# EAGLE board RFID_Controller (EAGLE 7.2.0)
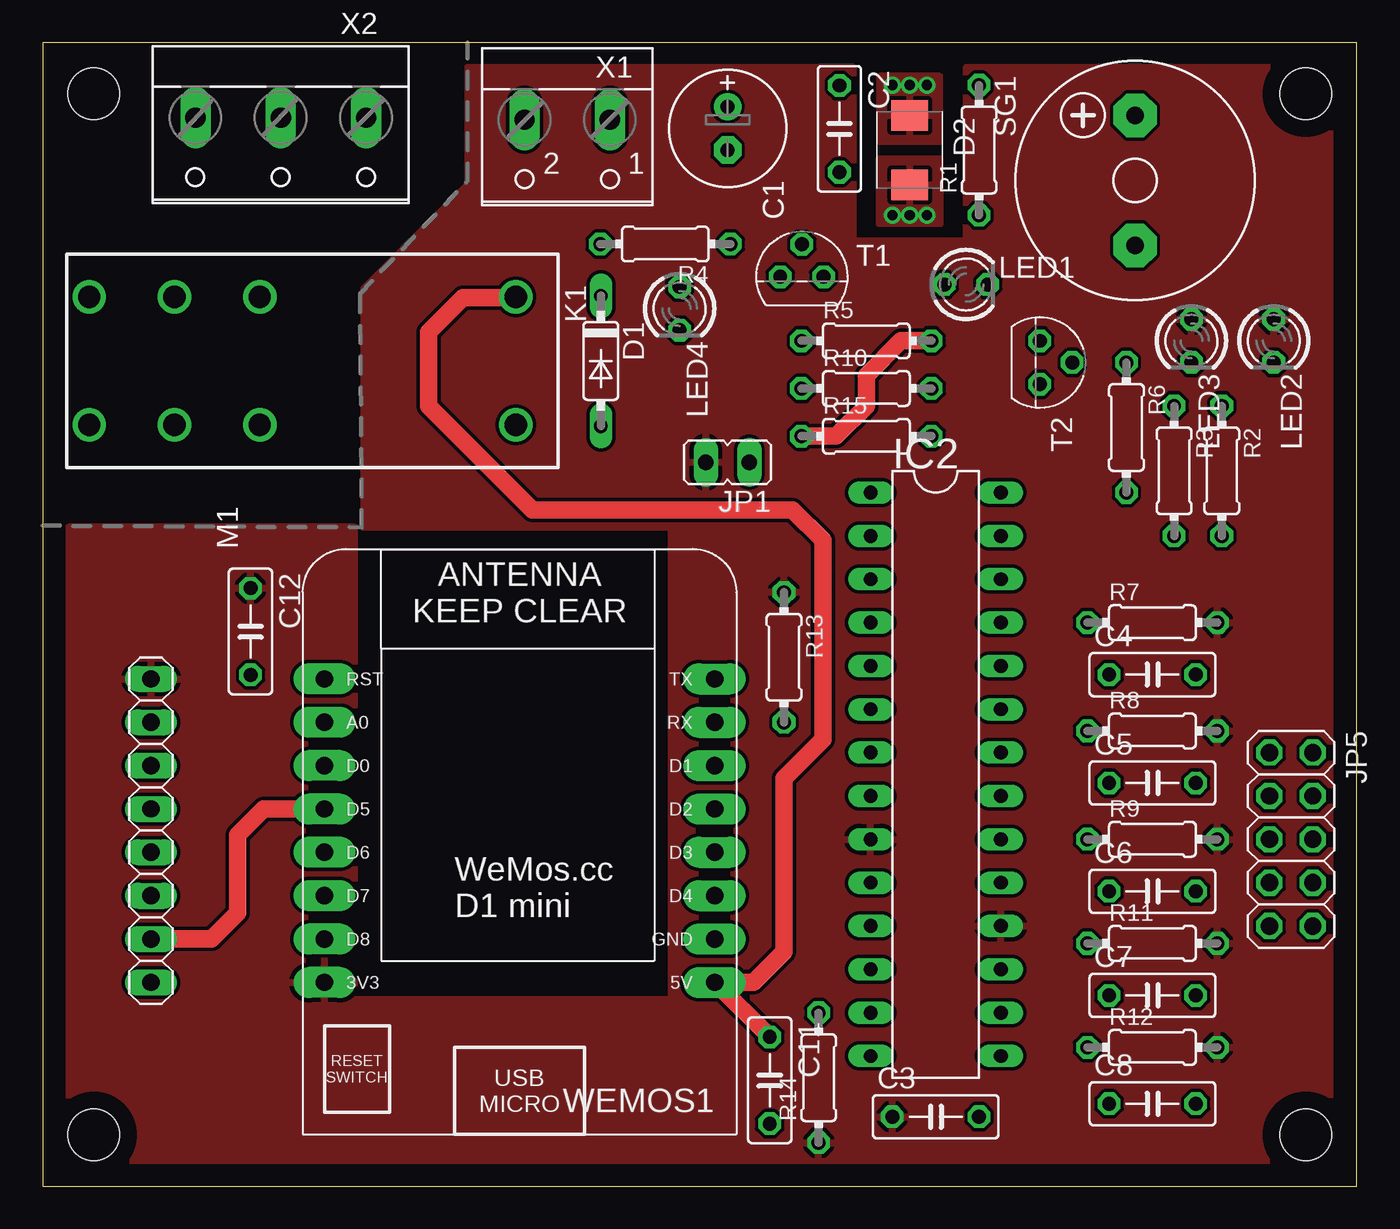
[diagram p0: board, top side]
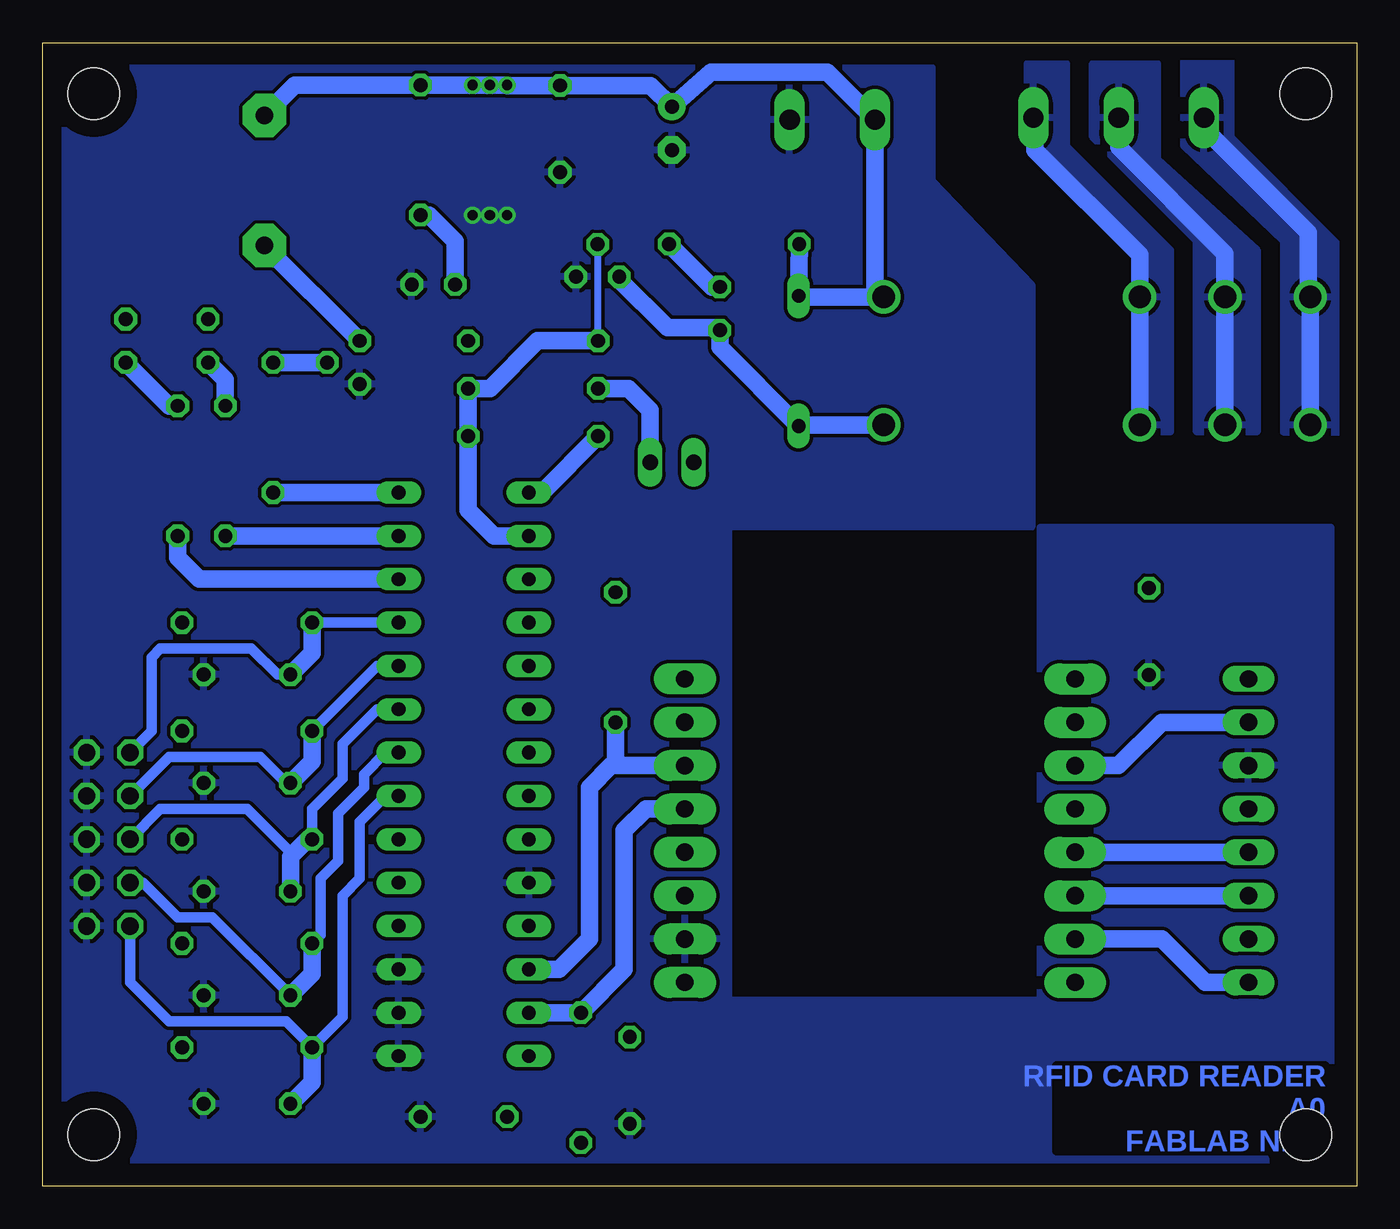
[diagram p1: board, bottom side, seen from below]

Size 77 x 67 mm. Coordinates in mm from the lower left corner, seen from the top.
Outline: 0,0 77,0 77,67 0,67 0,0
Copper layers (1*16): Top 0.035mm / dielectric 1.5mm / Bottom 0.035mm
Design rules "default *": minimum track width 10mil, minimum drill 0.2mm, track to track 8mil, track to pad 8mil, pad to pad 8mil, via to via 8mil, smd to smd 8mil, copper to edge 40mil, drill to drill 8mil, minimum pad ring 10mil, minimum via ring 8mil, stop-mask expansion 4mil, vias tented up to drill 0mil, thermal gap 10mil
Net classes: 1 HV: clearance 5 mm to class 0, clearance 1 mm
Holes 3 mm at 3,64 74,64 74,3 3,3

## Footprints (pad centres in the part's own frame; a part is rotated, then mirrored left to right if it is on the bottom)
E2,5-7 = drill 0.813 pad 1.6: + -1.27,0 | drill 0.813 pad 1.6 octagon: - 1.27,0
C050-025X075 = drill 0.813 octagon: 1 -2.54,0; 2 2.54,0
DO35-7 = drill 0.813 long: A 3.81,0; C -3.81,0
SMBJ = smd 1.78 x 2.16: A 2.04,0; C -2.03,0
DIL28-3 = drill 0.813 long: 1 -16.51,-3.81; 2 -13.97,-3.81; 3 -11.43,-3.81; 4 -8.89,-3.81; 5 -6.35,-3.81; 6 -3.81,-3.81; 7 -1.27,-3.81; 8 1.27,-3.81; 9 3.81,-3.81; 10 6.35,-3.81; 11 8.89,-3.81; 12 11.43,-3.81; 13 13.97,-3.81; 14 16.51,-3.81; 15 16.51,3.81; 16 13.97,3.81; 17 11.43,3.81; 18 8.89,3.81; 19 6.35,3.81; 20 3.81,3.81; 21 1.27,3.81; 22 -1.27,3.81; 23 -3.81,3.81; 24 -6.35,3.81; 25 -8.89,3.81; 26 -11.43,3.81; 27 -13.97,3.81; 28 -16.51,3.81
JP1 = drill 0.914 long: 1 0,-1.27; 2 0,1.27
2X05 = drill 1.016 octagon: 1 -5.08,-1.27; 2 -5.08,1.27; 3 -2.54,-1.27; 4 -2.54,1.27; 5 0,-1.27; 6 0,1.27; 7 2.54,-1.27; 8 2.54,1.27; 9 5.08,-1.27; 10 5.08,1.27
FTR-K1C = drill 1.3 pad 1.93: 1 -12.5,-3.75; 2 2.5,-3.75; 3 7.5,-3.75; 4 12.5,-3.75; 5 12.5,3.75; 6 7.5,3.75; 7 2.5,3.75; 8 -12.5,3.75
LED3MM = drill 0.813 octagon: A -1.27,0; K 1.27,0
RFID-RC522 = drill 1.016 long: 3V3 -8.89,0; GND -3.81,0; IRQ -1.27,0; MISO 1.27,0; MOSI 3.81,0; RST -6.35,0; SCK 6.35,0; SS 8.89,0
0204/7 = drill 0.813 octagon: 1 -3.81,0; 2 3.81,0
F/CM12P = drill 1.016 pad 2.54 octagon: + 3.81,0; - -3.81,0
TO92 = drill 0.813 octagon: 1 1.27,0; 2 0,1.905; 3 -1.27,0
WEMOS-D1-MINI = drill 1.016 pad 1.829 long: 3V3 -10.16,-10.16; 5V 12.7,-10.16; A0 -10.16,5.08; D0 -10.16,2.54; D1 12.7,2.54; D2 12.7,0; D3 12.7,-2.54; D4 12.7,-5.08; D5 -10.16,0; D6 -10.16,-2.54; D7 -10.16,-5.08; D8 -10.16,-7.62; GND 12.7,-7.62; RESET -10.16,7.62; RX 12.7,5.08; TX 12.7,7.62
W237-102 = drill 1.194 long: 1 -2.5,-1.27; 2 2.5,-1.27
W237-103 = drill 1.194 long: 1 -5,-1.29; 2 0,-1.29; 3 5,-1.29

## Placement (x,y rotation side)
C1  100u  [E2,5-7]  40.13,61.98 270 top
C2  100n  [C050-025X075]  46.69,61.95 270 top
C3  100n  [C050-025X075]  52.32,4.06 0 top
C4  100n  [C050-025X075]  65.02,29.97 0 top
C5  100n  [C050-025X075]  65.02,23.62 0 top
C6  100n  [C050-025X075]  65.02,17.27 0 top
C7  100n  [C050-025X075]  65.02,11.18 0 top
C8  100n  [C050-025X075]  65.02,4.83 0 top
C11  100n  [C050-025X075]  42.6,6.2 270 top
C12  100n  [C050-025X075]  12.18,32.5 270 top
D1  1N4148DO35-7  [DO35-7]  32.7,48.35 270 top
D2  SM6T5A  [SMBJ]  50.8,60.71 270 top
IC2  MCP23017SP  [DIL28-3]  52.32,24.13 270 top
JP1  [JP1]  40.13,42.42 90 top
JP5  [2X05]  73.15,20.32 270 top
K1  FTR-K1C  [FTR-K1C]  15.22,48.35 180 top
LED1  [LED3MM]  54.1,52.83 0 top
LED2  [LED3MM]  72.14,49.53 270 top
LED3  [LED3MM]  67.31,49.53 270 top
LED4  [LED3MM]  37.32,51.42 270 top
M1  [RFID-RC522]  6.35,20.83 270 top
R1  220  [0204/7]  54.86,60.71 90 top
R2  100R  [0204/7]  69.09,41.91 270 top
R3  100R  [0204/7]  66.29,41.91 270 top
R4  220  [0204/7]  36.48,55.2 180 top
R5  1k  [0204/7]  48.26,49.53 0 top
R6  1k  [0204/7]  63.5,44.45 270 top
R7  10k  [0204/7]  65.02,33.02 0 top
R8  10k  [0204/7]  65.02,26.67 0 top
R9  10k  [0204/7]  65.02,20.32 0 top
R10  1k  [0204/7]  48.26,46.74 0 top
R11  10k  [0204/7]  65.02,14.22 0 top
R12  10k  [0204/7]  65.02,8.13 0 top
R13  1k  [0204/7]  43.43,30.99 270 top
R14  1k  [0204/7]  45.47,6.35 90 top
R15  1k  [0204/7]  48.26,43.94 0 top
SG1  F/CM12P  [F/CM12P]  64.01,58.93 90 top
T1  BC547  [TO92]  44.49,53.28 0 top
T2  BC547  [TO92]  58.42,48.26 270 top
WEMOS1  [WEMOS-D1-MINI]  26.67,22.1 0 top
X1  [W237-102]  30.73,61.21 180 top
X2  [W237-103]  13.95,61.31 180 top

## Library data of the parts
C1-C8 C11 C12 R1-R15 = rcl
D1 D2 = diode
IC2 = microchip; MF: MICROCHIP; MPN: MCP23017-E/SP; OC_FARNELL: 1332088; OC_NEWARK: 31K2959
JP1 = jumper
JP5 = pinhead
K1 = relay; OC_FARNELL: unknown; OC_NEWARK: unknown
LED1-LED4 = led
M1 = mfrc522-module
SG1 = buzzer; OC_FARNELL: unknown; OC_NEWARK: unknown
T1 T2 = transistor
WEMOS1 = esp8266modules
X1 = con-wago-500; MPN: 237-102; OC_FARNELL: unknown; OC_NEWARK: 70K9898
X2 = con-wago-500; MPN: 237-103; OC_FARNELL: unknown; OC_NEWARK: 18M7116

## Nets
3V3: C3.1 C12.1 IC2.9 IC2.18 JP1.2 LED2.A LED3.A M1.3V3 R7.2 R8.2 R9.2 R11.2 R12.2 R13.1 R14.1 WEMOS1.3V3
5V: C1.+ C2.1 C11.1 D1.C D2.C K1.1 R1.2 R4.2 SG1.+ WEMOS1.5V X1.2
BUZZ: IC2.28 R6.2
CLK: M1.SCK WEMOS1.D5
CONN: IC2.27 R3.2
CS: M1.SS WEMOS1.D8
DK: C4.1 IC2.25 JP5.1 R7.1
EX0: C5.1 IC2.24 JP5.3 R8.1
EX1: C6.1 IC2.23 JP5.5 R9.1
EX2: C7.1 IC2.22 JP5.7 R11.1
EX3: C8.1 IC2.21 JP5.9 R12.1
GND: C1.- C2.2 C3.2 C4.2 C5.2 C6.2 C7.2 C8.2 C11.2 C12.2 D2.A IC2.10 IC2.15 IC2.16 IC2.17 JP5.2 JP5.4 JP5.6 JP5.8 JP5.10 LED1.K M1.GND T1.1 T2.1 WEMOS1.GND X1.1
MISO: M1.MISO WEMOS1.D6
MOSI: M1.MOSI WEMOS1.D7
N$1: LED1.A R1.1
N$2: LED2.K R2.1
N$3: LED3.K R3.1
N$4: LED4.A R4.1
N$5: D1.A K1.8 LED4.K T1.3
N$6: R6.1 T2.2
N$7: SG1.- T2.3
N$8: IC2.1 R5.2 R15.1
N$12: JP1.1 R10.1
REL_COMM [HV]: K1.3 K1.6 X2.2
REL_NC [HV]: K1.2 K1.7 X2.1
REL_NO [HV]: K1.4 K1.5 X2.3
RST: M1.RST WEMOS1.D0
SCL: IC2.12 R13.2 WEMOS1.D1
SDA: IC2.13 R14.2 WEMOS1.D2
SW: IC2.2 R5.1 R10.2 R15.2 T1.2
TXRX: IC2.26 R2.2

## Tracks (layer width: path | path; a pad name or v marks a point on that pad's centre or on a via)
3V3
  pour Top: 24.89,65.53 24.89,58.67 18.8,52.58 18.8,38.61 36.83,38.61 36.83,10.92 18.29,10.92 18.29,38.61 1.52,38.61 1.52,1.52 75.44,1.52 75.44,65.53 54.1,65.53 54.1,55.37 47.5,55.37 47.5,65.53
5V  (via drill 0.6)
  Top 1.016: K1.1 27.69,52.07 24.64,52.07 22.61,50.04 22.61,45.72 28.7,39.62 43.94,39.62 45.72,37.85 45.72,26.16 43.43,23.88 43.43,13.72 41.66,11.94 WEMOS1.5V 39.4,11.94 C11.1
  Bottom 1.016: R4.2 D1.C 32.64,52.1 K1.1 28.23,52.62 X1.2 31.03,65.28 37.85,65.28 C1.+ 41.38,64.49 C2.1 49.76,64.49 v49.78,64.52 v50.8,64.52 v51.82,64.52 R1.2 62.23,64.52 SG1.+
  pour Top: 49.02,65.02 49.02,61.21 52.58,61.21 52.58,65.02
BUZZ
  Bottom 1.016: R6.2 IC2.28
CLK
  Top 1.016: WEMOS1.D5 12.95,22.1 11.43,20.57 11.43,16 9.91,14.48 M1.SCK
CONN
  Bottom 1.016: IC2.27 R3.2
CS
  Bottom 1.016: WEMOS1.D8 11.43,14.48 8.89,11.94 M1.SS
DK
  Bottom 0.61: IC2.25 R7.1 | C4.1 63.25,29.97 64.77,31.5 70.1,31.5 70.61,30.99 70.61,26.67 JP5.1
  Bottom 1.016: R7.1 61.21,31.24 C4.1
EX0
  Bottom 0.61: IC2.24 57.4,30.48 R8.1 | C5.1 62.74,23.62 64.26,25.15 69.6,25.15 JP5.3
  Bottom 1.016: R8.1 61.21,24.89 C5.1
EX1
  Bottom 0.61: IC2.23 57.4,27.94 59.44,25.91 59.44,23.88 61.21,22.1 R9.1 | 62.36,19.43 65.02,22.1 70.1,22.1 JP5.5
  Bottom 1.016: R9.1 61.47,20.32 62.36,19.43 62.48,19.3 C6.1
EX2
  Bottom 0.61: IC2.22 56.9,25.4 58.17,24.13 58.17,23.37 59.69,21.84 59.69,19.05 60.71,18.03 60.71,14.73 R11.1 | C7.1 67.06,15.75 69.09,15.75 71.12,17.78 JP5.7
  Bottom 1.016: R11.1 61.21,12.45 C7.1
EX3
  Bottom 0.61: IC2.21 56.9,22.86 58.42,21.34 58.42,18.03 59.44,17.02 59.44,9.91 R12.1 62.74,9.65 69.6,9.65 71.88,11.94 JP5.9
  Bottom 1.016: R12.1 61.21,6.1 C8.1
GND  (via drill 0.6)
  other vias: 49.78,56.9 50.8,56.9 51.82,56.9
  pour Bottom: 24.89,65.53 24.89,58.93 19.05,52.83 19.05,38.61 36.83,38.61 36.83,10.92 18.54,10.92 18.54,38.61 1.52,38.61 1.52,1.52 75.69,1.52 75.69,65.53
  pour Top: 52.58,56.39 49.02,56.39 49.02,60.2 52.58,60.2
MISO
  Bottom 1.016: WEMOS1.D6 M1.MISO
MOSI
  Bottom 1.016: WEMOS1.D7 M1.MOSI
N$1
  Bottom 1.016: R1.1 54.36,56.9 52.83,55.37 LED1.A
N$2
  Bottom 1.016: R2.1 69.6,45.72 LED2.K
N$3
  Bottom 1.016: R3.1 66.29,47.24 LED3.K
N$4
  Bottom 1.016: LED4.A 37.78,52.69 R4.1
N$5
  Bottom 1.016: K1.8 32.64,44.6 D1.A 37.32,49.16 LED4.K 37.46,50.29 40.39,50.29 43.22,53.12 T1.3
N$6
  Bottom 1.016: R6.1 T2.2
N$7
  Bottom 1.016: SG1.- T2.3
N$8
  Top 1.016: R5.2 50.29,49.53 48.26,47.5 48.26,45.72 46.48,43.94 R15.1
  Bottom 1.016: IC2.1 47.75,40.64 R15.1
N$12
  Bottom 1.016: R10.1 42.67,46.74 41.4,45.47 JP1.1
REL_COMM
  Bottom 1.016: K1.6 K1.3 7.72,54.65 13.95,60.88 X2.2
  pour Bottom: 11.68,65.79 11.68,60.2 5.84,54.86 5.84,44.2 9.4,44.2 9.4,55.37 15.49,61.47 15.49,65.79
REL_NC
  Bottom 1.016: K1.7 K1.2 12.72,54.57 18.85,60.7 18.85,62.9 X2.1
  pour Bottom: 10.92,44.2 12.95,44.2 12.95,54.61 19.3,61.21 19.3,65.79 17.02,65.79 17.02,60.96 10.92,54.86
REL_NO
  Bottom 1.016: X2.3 8.95,61.98 2.85,55.87 2.85,52.23 K1.4 K1.5
  pour Bottom: 10.16,66.55 10.16,60.96 4.32,55.37 4.32,44.2 0.76,44.2 1.02,55.12 7.37,61.47 7.37,66.55
RST
  Bottom 1.016: WEMOS1.D0 13.97,24.64 11.43,27.18 M1.RST
SCL
  Bottom 1.016: WEMOS1.D1 43.43,24.64 | 43.43,24.64 43.69,24.64 44.96,23.37 44.96,14.48 46.74,12.7 IC2.12 | R13.2 43.43,24.64
SDA
  Bottom 1.016: WEMOS1.D2 41.66,22.1 42.93,20.83 42.93,12.7 R14.2 IC2.13
SW
  Bottom 0.406: R5.1 44.45,55.15 T1.2
  Bottom 1.016: IC2.2 50.55,38.1 52.07,39.62 R15.2 R10.2 50.8,46.74 48.01,49.53 R5.1
TXRX
  Bottom 1.016: IC2.26 67.82,35.56 69.09,36.83 R2.2

## Text on the board
Bottom: RFID CARD READER / A0 / FABLAB NBG